# Altium PCB LM-004-B.PcbDoc (part 1 of 2)
Units mil, origin at the board's own origin, x right, y up, seen from the top; angles counter-clockwise.
Board outline 2155.24 x 3589 mil, 4 copper layers (Top Layer, Signal Layer 2, Signal Layer 1, Bottom Layer), stack 30.635 mil thick; 59 components, 75 nets, 330 pads, 41 vias.
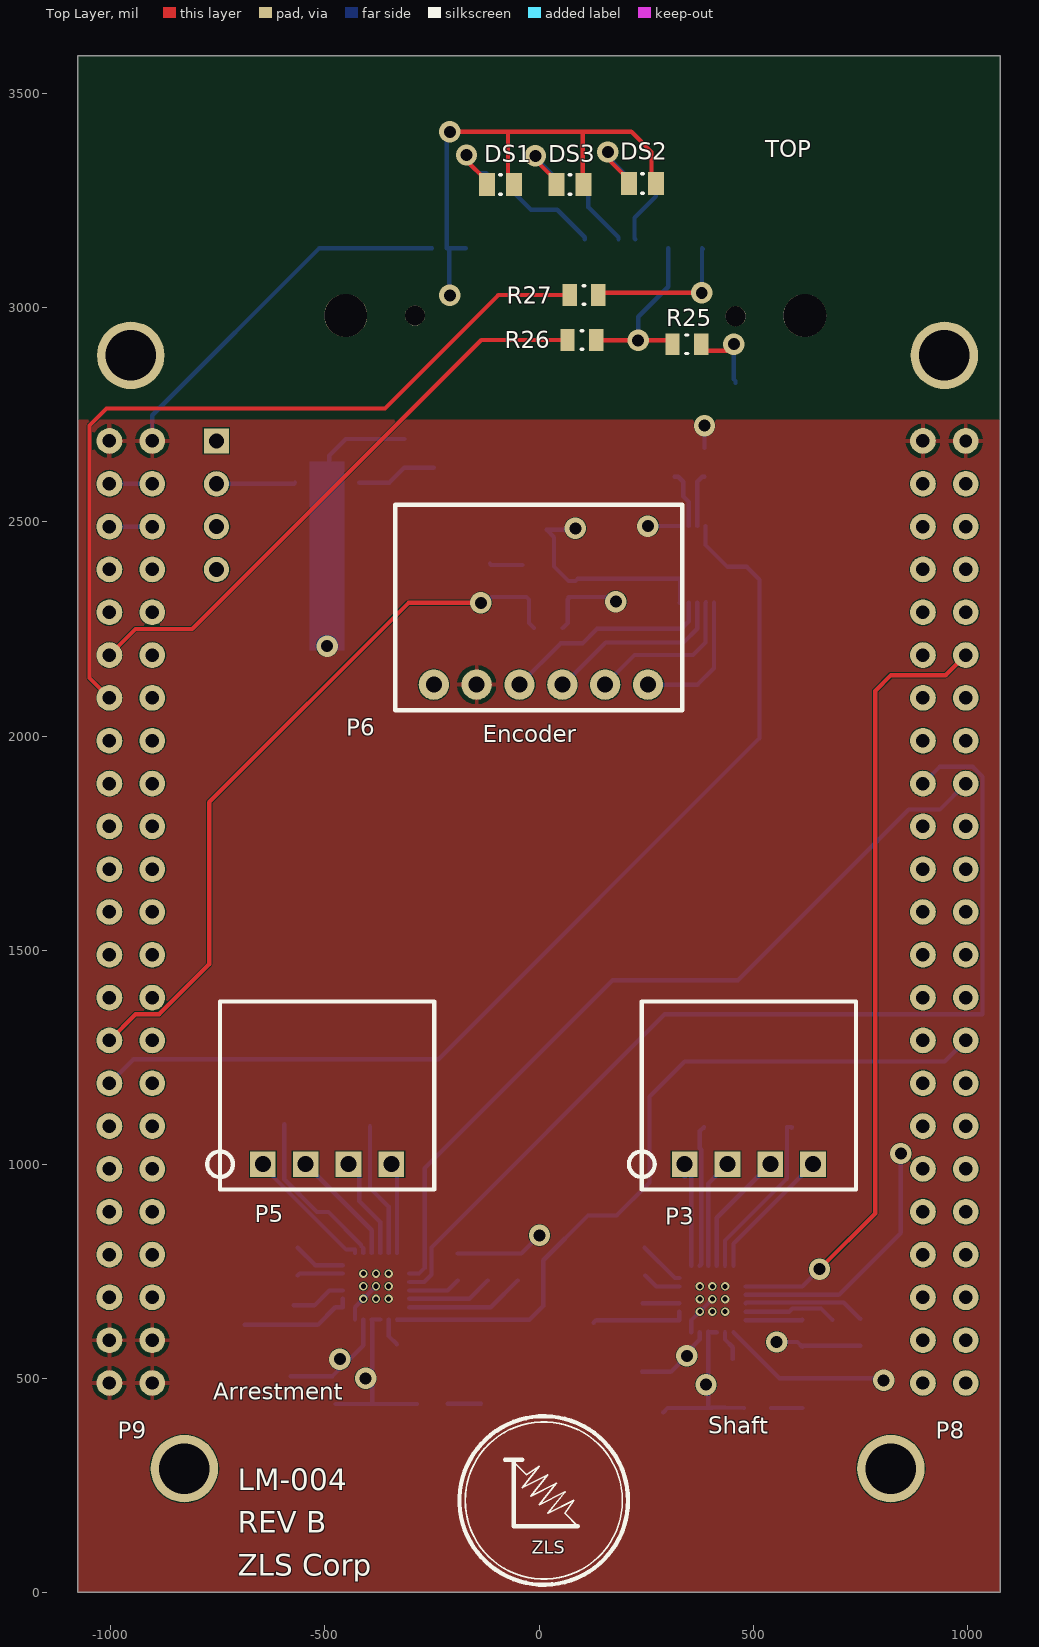
[diagram p0: Top Layer view]
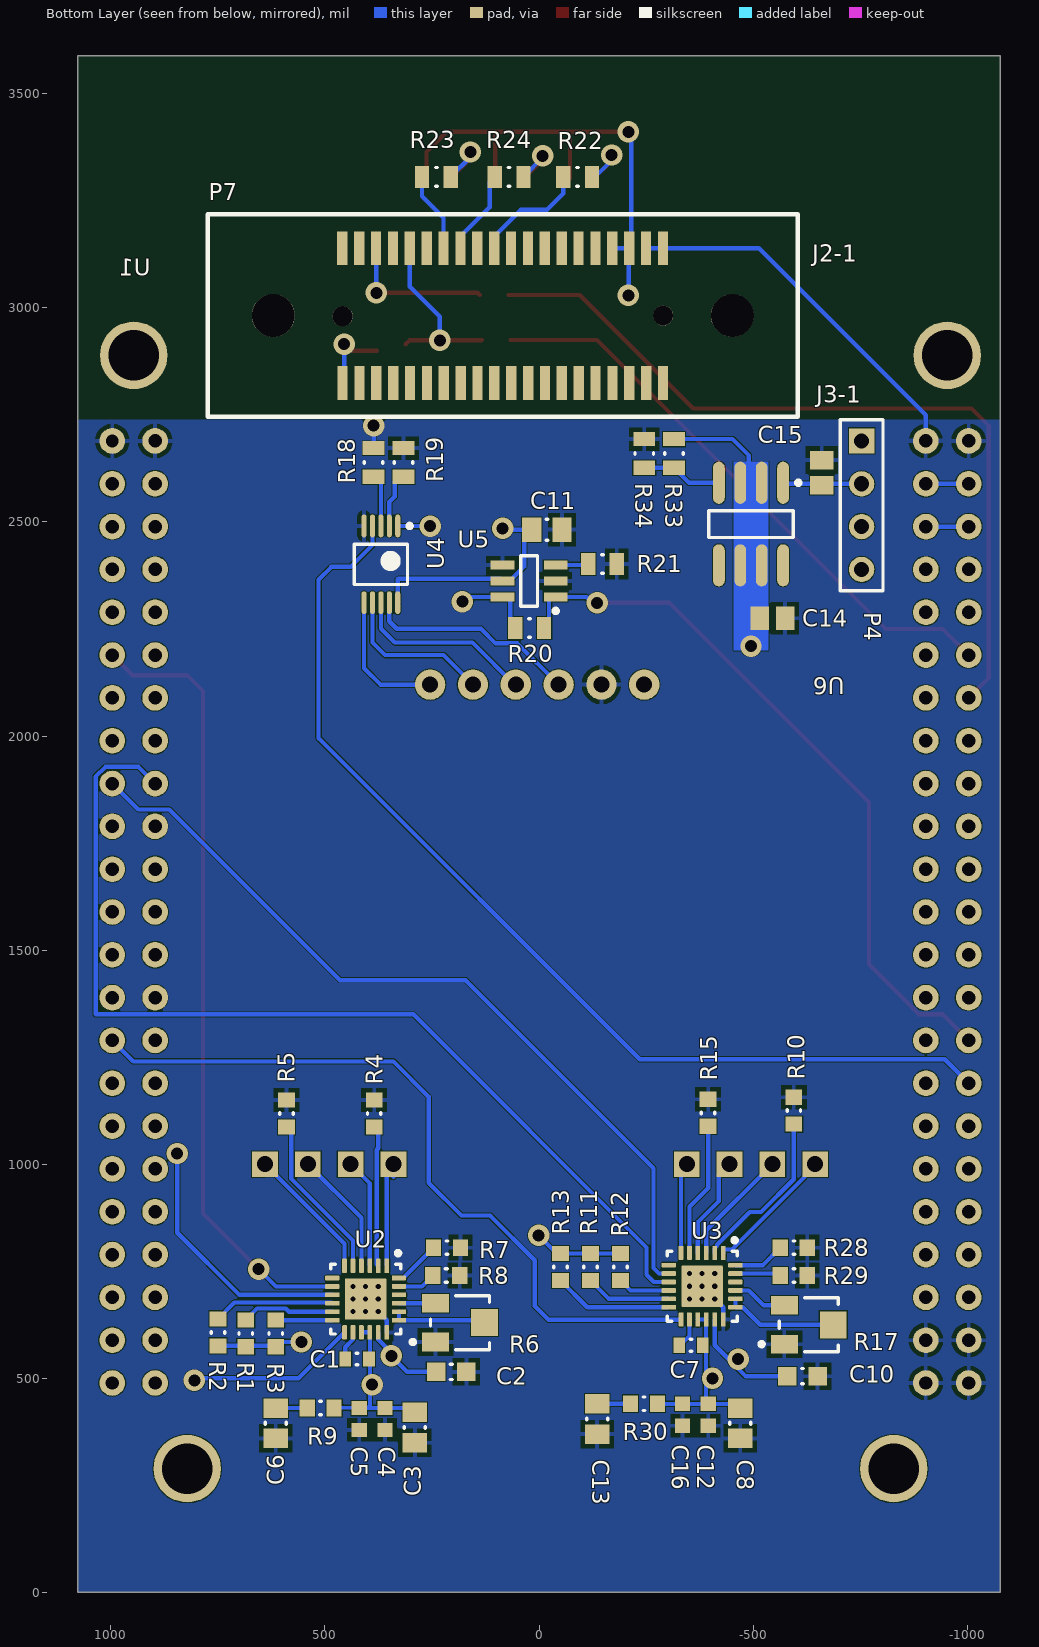
[diagram p1: Bottom Layer view, seen from below]
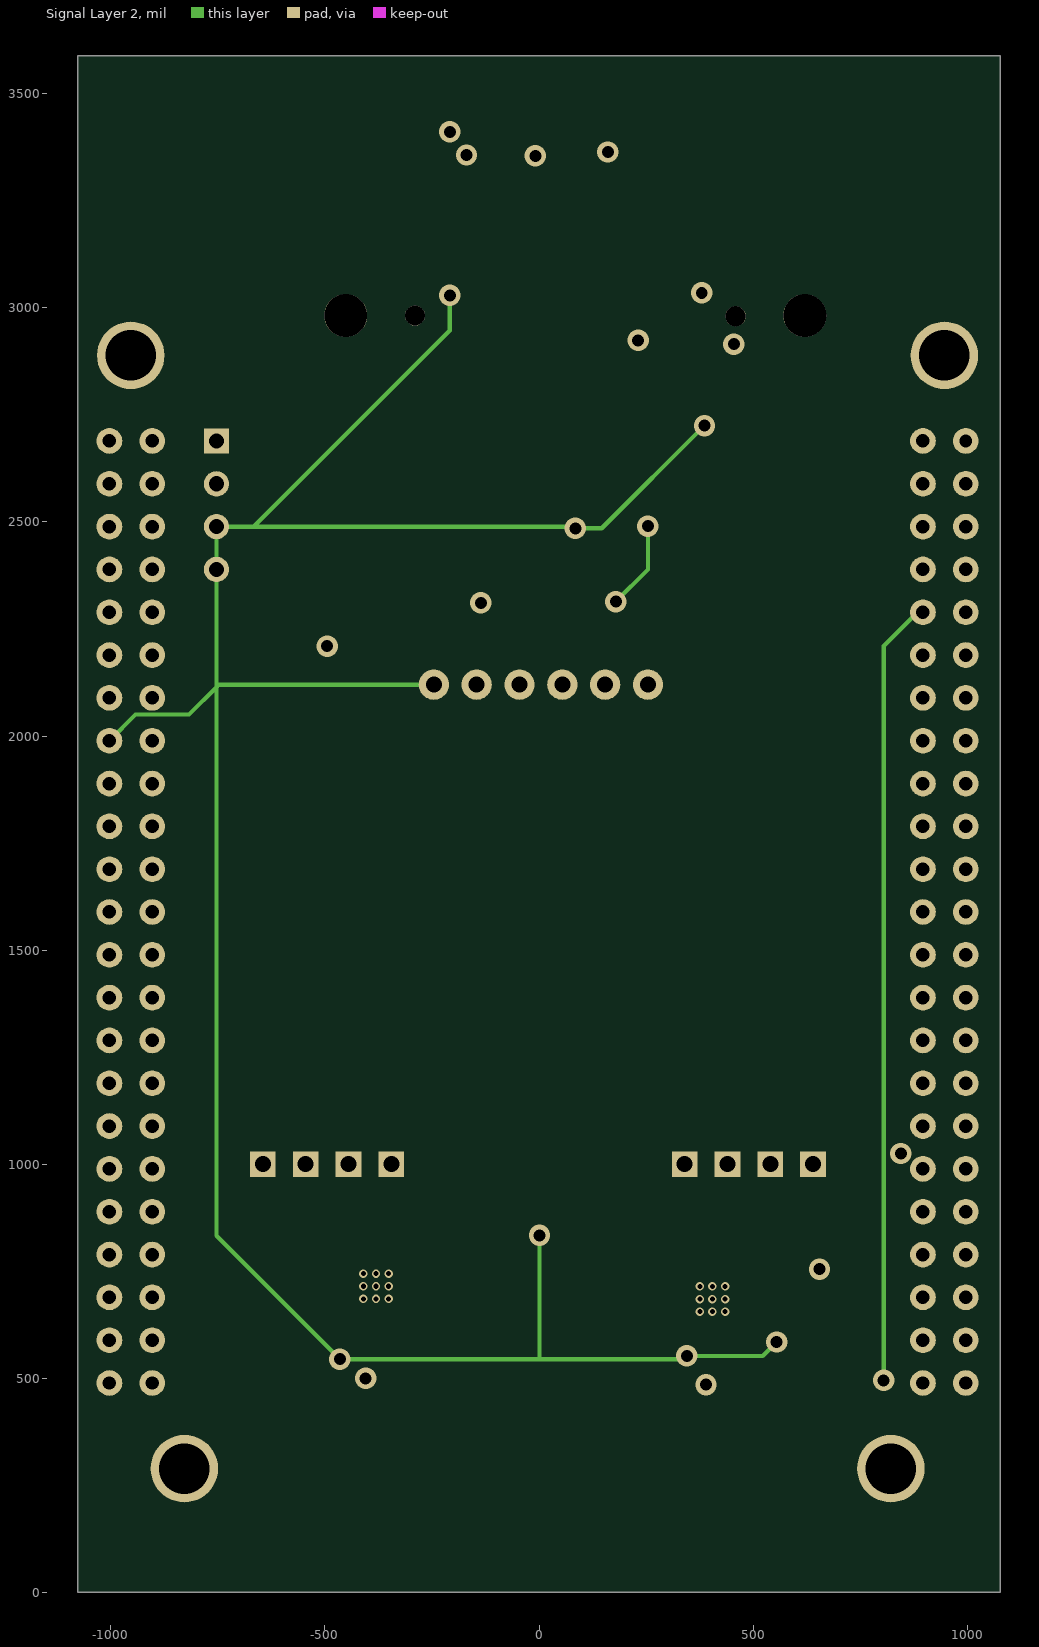
[diagram p2: Signal Layer 2]
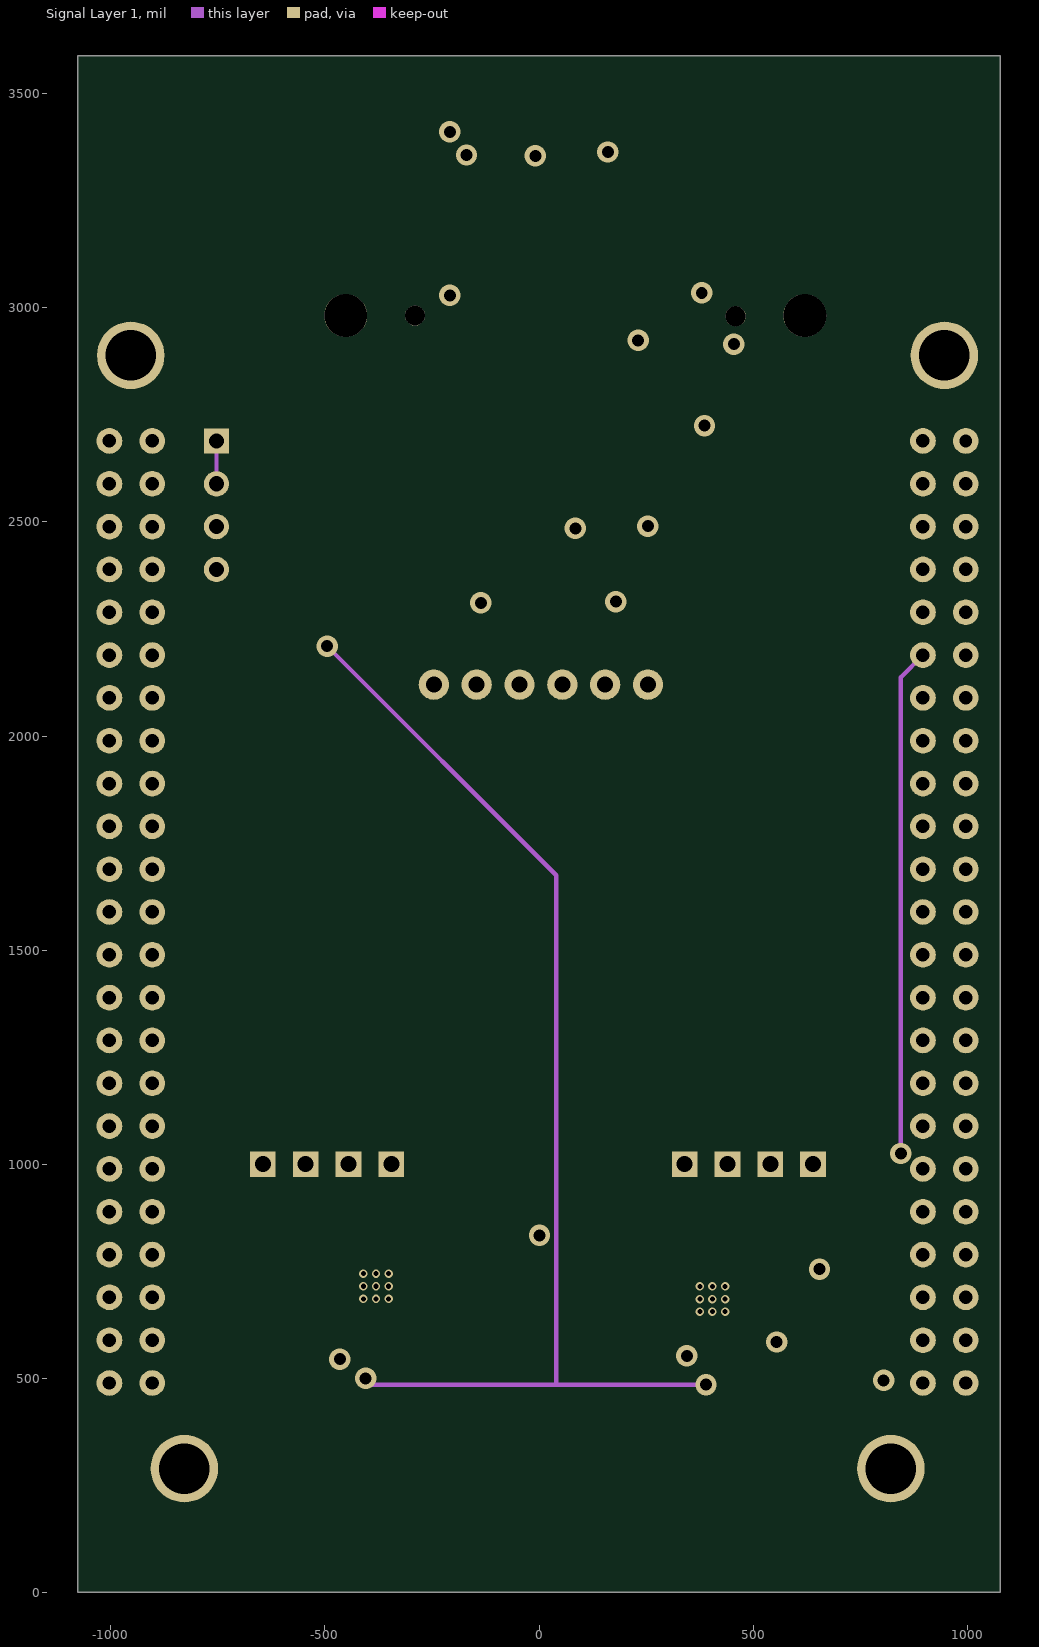
[diagram p3: Signal Layer 1]

## Layer stack, top to bottom
Top Solder: solder mask 0.4, Solder Resist, Dk 3.5
Top Layer: signal copper 1.4
Dielectric 1: core 10, FR-4, Dk 4.2
Signal Layer 2: signal copper 1.4173
Dielectric 4: prepreg 5, Dk 4.2
Signal Layer 1: signal copper 1.4173
Dielectric 3: core 10, Dk 4.2
Bottom Layer: signal copper 1.4
Bottom Solder: solder mask 0.4, Solder Resist, Dk 3.5

## Board outline
-1077.62,0 1077.62,0 1077.62,3589 -1077.62,3589

## Design rules (kind name [scope] priority, off if disabled: settings)
Clearance [All] p1: gap=1.97 ignorepadtopadclearanceinfootprint=TRUE except(0: SMDPad-Via; 1: SMDPad-SMDPad SMDPad-THPad THPad-THPad Via-Via Via-Fill Via-Poly Via-Region Via-Text Via-Hole)
HoleSize [All] p1: absolutevalues=TRUE maxlimit=196.85 minlimit=1 maxpercent=80.000 minpercent=20.000
HoleToHoleClearance [All] p1: gap=1 allowstackedmicrovias=TRUE
MinimumSolderMaskSliver [All] p1: minsoldermaskwidth=1
PolygonConnect [All] p1: connectstyle=Relief reliefconductorwidth=10 reliefentries=4 polygonreliefangle="90 Angle" airgapwidth=10
RoutingVias [All] p1: holewidth=28 width=50 viastyle="Through Hole" minholewidth=10 minwidth=15 maxholewidth=28 maxwidth=50
SilkToSolderMaskClearance [IsPad] p1: minsilkscreentomaskgap=1.97 clearancetoexposedcopper=TRUE
SolderMaskExpansion [All] p1: expansion=1.97
Width [All] p1: maxlimit=10 minlimit=10 preferedwidth=10
26 further rules are at their usual default settings.

## Classes and differential pairs
component class Bluetooth: DS1 DS2 DS3 P7 R22 R23 R24 R25 R26 R27
component class BBB_Connections: C14 C15 P3 P4 P5 R33 R34 U1 U6
component class DC-Motor-DRV: C1 C2 C3 C4 C5 C6 C7 C8 C10 C12 C13 C16 R1 R2 R3 R4 R5 R6 R7 R8 R9 R10 R11 R12 R13 R15 R17 R28 R29 R30 U2 U3
component class Encoder: C11 P6 R18 R19 R20 R21 U4 U5

## Components (designator, comment, footprint, x,y, rotation, side; value= is the part's Value field where it differs from the comment)
C1 "10nF" CAPC0603(1608)100_L 425,545 r0 bottom
C2 "4.7uF" CAPC0603(1608)55_M 205,515 r0 bottom
C3 "10uF" CAPC0805(2012)145_N 290,385 r90 bottom
C4 "0.1uF" CAPC1608X94X35LL15T15 420,405 r270 bottom
C5 "0.1uF" CAPC1608X94X35LL15T15 360,405 r270 bottom
C6 "10uF" CAPC0805(2012)145_N 615,395 r90 bottom
C7 "10nF" CAPC0603(1608)100_L -355,577.1 r0 bottom
C8 "10uF" CAPC0805(2012)145_N -470,395 r90 bottom
C10 "4.7uF" CAPC0603(1608)55_M -615,505 r0 bottom
C11 "CAP CER 0.1UF 25V X7R 0805" CAPC0805(2012)145_N -18.2,2481.99 r180 bottom
C12 "0.1uF" CAPC1608X94X35LL15T15 -395,415 r270 bottom
C13 "10uF" CAPC0805(2012)145_N -135.69,405 r90 bottom
C14 "Cap Pol3" C0805 -545,2275 r180 bottom value=10uF
C15 "Cap Pol3" C0805 -660,2615 r90 bottom value=10uF
C16 "0.1uF" CAPC1608X94X35LL15T15 -335,415 r270 bottom
DS1 "Lite-On LTST-S220KGKT Green LED, 571 nm 2012 (0805) Side View, Rectangle Lens SMD package" 0805C_L -90.13,3287.99 r180 top
DS2 "Lite-On LTST-S220KGKT Green LED, 571 nm 2012 (0805) Side View, Rectangle Lens SMD package" 0805C_L 242.1,3290.23 r180 top
DS3 "Lite-On LTST-S220KGKT Green LED, 571 nm 2012 (0805) Side View, Rectangle Lens SMD package" 0805C_L 72.1,3287.99 r180 top
P3 "IPL1-104-01-F-S-RA" IPL1-104-01-L-S-RA-K 340,1000 r0 top
P4 "SSW-104-01-G-S" HDR1X4 -753.38,2689 r270 bottom
P5 "IPL1-104-01-F-S-RA" IPL1-104-01-L-S-RA-K -645,1000 r0 top
P6 "IPL1-106-01-L-S-RA-K" IPL1-106-01-L-S-RA-K 4.31,2120 r0 top locked
P7 "FSI-120-03-G-D-E-AB" FSI-120-03-G-D-E-AB 84.62,2982 r180 bottom
R1 "47K" RESC0603(1608)_N 685,605 r270 bottom
R2 "47K" RESC0603(1608)_N 750,607.24 r270 bottom
R3 "47K" RESC0603(1608)_N 614.84,605 r270 bottom
R4 "0.1" RESC0603(1608)_N 385,1118.46 r90 bottom value="1020.00 Ohm"
R5 "0.1" RESC0603(1608)_N 590,1118.46 r90 bottom value="1020.00 Ohm"
R6 "3313J-1-503E" BOUR-3313J-1_V 184.63,630 r180 bottom
R7 "47K" RESC0603(1608)_N 215,805 r0 bottom
R8 "47K" RESC0603(1608)_N 216.71,740 r0 bottom
R9 "1" RESC0603(1608)_N 510,430.59 r180 bottom
R10 "0.1" RESC0603(1608)_N -595,1125 r90 bottom value="1020.00 Ohm"
R11 "47K" RESC0603(1608)_N -120,760 r90 bottom
R12 "47K" RESC0603(1608)_N -190,760 r90 bottom
R13 "47K" RESC0603(1608)_N -50,760 r90 bottom
R15 "0.1" RESC0603(1608)_N -395,1120 r90 bottom value="1020.00 Ohm"
R17 "3313J-1-503E" BOUR-3313J-1_V -630,625 r180 bottom
R18 "10K" RESC0805(2012)_L 386.32,2639 r90 bottom
R19 "10K" RESC0805(2012)_L 316.31,2639 r270 bottom
R20 "DNP" RESC0805(2012)_L 21.8,2251.99 r0 bottom
R21 "43.2K" RESC0805(2012)_L -148.2,2401.99 r180 bottom
R22 "3.9k" RESC0805(2012)_L -90.13,3306 r180 bottom
R23 "3.9k" RESC0805(2012)_L 239.87,3306 r180 bottom
R24 "3.9k" RESC0805(2012)_L 69.87,3306 r180 bottom
R25 "10K" RESC0805(2012)_L 345,2915 r180 top value=3.9k
R26 "100" RESC0805(2012)_L 100,2925 r0 top value=3.9k
R27 "100" RESC0805(2012)_L 105,3030 r0 top value=3.9k
R28 "47K" RESC0603(1608)_N -595,805 r0 bottom
R29 "47K" RESC0603(1608)_N -595,740 r0 bottom
R30 "1" RESC0603(1608)_N -245,440.59 r180 bottom
R33 "0.1" RESC0805(2012)_L -315,2660 r90 bottom
R34 "0.1" RESC0805(2012)_L -245.68,2660 r270 bottom
U1 "BBB" "BEAGLEBONE BLACK MEZANINE" -3.38,1589 r180 bottom locked
U2 "DRV8834RGER" RGE0024B_V 405,685 r270 bottom
U3 "DRV8834RGER" RGE0024B_V -380.81,715 r270 bottom
U4 "MAX1484EUB+" MAX1484EUB+ 369.32,2401 r270 bottom
U5 "LTC6994MPS6-2#TRMPBF" LTC6994MPS6-2#TRMPBF 23.29,2361.99 r0 bottom
U6 "LM317LM/NOPB" M08A_M -495,2495 r270 bottom

## Footprints (in the part's own frame and the unit in brackets; to place one, negate y for a bottom-side part, rotate by r counter-clockwise, add the part's x,y. Pads: shape width x height; smd on the part's side, far side on the other; paste and mask are expansions set on the pad)
0805C_L [mm]
  rect 0.95x1.35 smd: 1(-0.8,0) 2(0.8,0)
  silkscreen extent -0.05,-0.58 0.05,0.58, body extent -1.1,-0.72 1.1,0.72, height 0.75
"BEAGLEBONE BLACK MEZANINE" [mil]
  round 60 hole 31.5: 8-1(-900,1100) 8-3(-900,1000) 8-4(-1000,1000) 8-5(-900,900) 8-6(-1000,900) 8-7(-900,800) 8-8(-1000,800) 8-9(-900,700) 8-10(-1000,700) 8-11(-900,600) 8-12(-1000,600) 8-13(-900,500) 8-14(-1000,500) 8-15(-900,400) 8-16(-1000,400) 8-17(-900,300) 8-18(-1000,300) 8-19(-900,200) 8-20(-1000,200) 8-21(-900,100) 8-22(-1000,100) 8-23(-900,0) 8-24(-1000,0) 8-25(-900,-100) 8-26(-1000,-100) 8-27(-900,-200) 8-28(-1000,-200) 8-29(-900,-300) 8-30(-1000,-300) 8-31(-900,-400) 8-32(-1000,-400) 8-33(-900,-500) 8-34(-1000,-500) 8-35(-900,-600) 8-36(-1000,-600) 8-37(-900,-700) 8-38(-1000,-700) 8-39(-900,-800) 8-40(-1000,-800) 8-41(-900,-900) 8-42(-1000,-900) 8-43(-900,-1000) 8-44(-1000,-1000) 8-45(-900,-1100) 8-46(-1000,-1100) 9-1(1000,1100) 9-2(900,1100) 9-3(1000,1000) 9-4(900,1000) 9-5(1000,900) 9-6(900,900) 9-7(1000,800) 9-8(900,800) 9-9(1000,700) 9-10(900,700) 9-11(1000,600) 9-12(900,600) 9-13(1000,500) 9-14(900,500) 9-15(1000,400) 9-16(900,400) 9-17(1000,300) 9-18(900,300) 9-19(1000,200) 9-20(900,200) 9-21(1000,100) 9-22(900,100) 9-23(1000,0) 9-24(900,0) 9-25(1000,-100) 9-26(900,-100) 9-27(1000,-200) 9-28(900,-200) 9-29(1000,-300) 9-30(900,-300) 9-31(1000,-400) 9-32(900,-400) 9-33(1000,-500) 9-34(900,-500) 9-35(1000,-600) 9-36(900,-600) 9-37(1000,-700) 9-38(900,-700) 9-39(1000,-800) 9-40(900,-800) 9-41(1000,-900) 9-42(900,-900) 9-43(1000,-1000) 9-44(900,-1000) 9-45(1000,-1100) 9-46(900,-1100)
  round 60 hole 30 paste+0: 8-2(-1000,1100)
  round 157.48 hole 118.11 paste+0: ""(-950,1300)
  round 157.48 hole 118.11: ""(-825,-1300) ""(825,-1300) ""(950,1300)
  body extent -1047,-1163 1048,1157, height 335
BOUR-3313J-1_V [mm] "SMD, 3-Leads, Body 3.5x3.2mm, Pitch 1.15mm"
  rect 1.6x1.1 smd paste+0: 1(-1.45,-1.15) 3(-1.45,1.15)
  rect 1.6x1.6 smd paste+0: 2(1.45,0)
  silkscreen extent -2.93,-1.6 1.75,1.6, body extent -1.75,-1.65 1.75,1.65, height 2.11
C0805 [mm] "Chip Capacitor, Body 2.0x1.3mm, IPC High Density"
  rect 1.1x1.4 smd: 1(-0.75,0) 2(0.75,0)
  body extent -1.1,-0.72 1.1,0.72, height 1.4
CAPC0603(1608)55_M [mm] "Chip Capacitor, Body 1.6x0.8mm, Height 0.55mm, IPC Low Density"
  rect 1.1x1.1 smd: 1(-0.9,0) 2(0.9,0)
  silkscreen extent -0.05,-0.45 0.05,0.45, body extent -0.87,-0.47 0.88,0.48, height 0.55
CAPC0603(1608)100_L [mm] "Chip Capacitor, Body 1.6x0.8mm, Height 1.0mm, IPC High Density"
  rect 0.7x0.9 smd: 1(-0.7,0) 2(0.7,0)
  silkscreen extent -0.05,-0.35 0.05,0.35, body extent -0.87,-0.47 0.88,0.48, height 1
CAPC0805(2012)145_N [mm] "Chip Capacitor, Body 2.0x1.2mm, Height 1.45mm, IPC Medium Density"
  rect 1.15x1.45 smd: 1(-0.9,0) 2(0.9,0)
  silkscreen extent -0.05,-0.62 0.05,0.63, body extent -1.1,-0.72 1.1,0.73, height 1.45
CAPC1608X94X35LL15T15 [mm]
  rect 0.85x0.9 smd: 1(-0.65,0) 2(0.65,0)
  body extent -0.88,-0.48 0.87,0.48, height 0.94
FSI-120-03-G-D-E-AB [mil]
  round 100 hole 100: hole(-536.2,0) hole(536.2,0)
  round 47 hole 47: hole(-374.3,-1.6) hole(374.3,0)
  rect 24x78.74 smd: J2-1(373.91,157.36) J2-2(334.51,157.36) J2-3(295.11,157.36) J2-4(255.71,157.36) J2-5(216.31,157.36) J2-6(176.91,157.36) J2-7(137.51,157.36) J2-8(98.11,157.36) J2-9(58.71,157.36) J2-10(19.31,157.36) J2-11(-20.09,157.36) J2-12(-59.49,157.36) J2-13(-98.89,157.36) J2-14(-138.29,157.36) J2-15(-177.69,157.36) J2-16(-217.09,157.36) J2-17(-256.49,157.36) J2-18(-295.89,157.36) J2-19(-335.29,157.36) J2-20(-374.69,157.36) J3-1(374.3,-157.36) J3-2(334.9,-157.36) J3-3(295.5,-157.36) J3-4(256.1,-157.36) J3-5(216.7,-157.36) J3-6(177.3,-157.36) J3-7(137.9,-157.36) J3-8(98.5,-157.36) J3-9(59.1,-157.36) J3-10(19.7,-157.36) J3-11(-19.7,-157.36) J3-12(-59.1,-157.36) J3-13(-98.5,-157.36) J3-14(-137.9,-157.36) J3-15(-177.3,-157.36) J3-16(-216.7,-157.36) J3-17(-256.1,-157.36) J3-18(-295.5,-157.36) J3-19(-334.9,-157.36) J3-20(-374.3,-157.36)
  silkscreen extent -689,-236 689,236, body extent -633,-179 710,188, height 162
HDR1X4 [mm] "Connector; Header; 4 Position"
  rect 1.5x1.5 hole 0.9: 1(0,0)
  round 1.5 hole 0.9: 2(2.54,0) 3(5.08,0) 4(7.62,0)
  silkscreen extent -1.27,-1.27 8.89,1.27
IPL1-104-01-L-S-RA-K [mil]
  rect 60x60 hole 37.4: 1(0,0) 2(100,0) 3(200,0) 4(300,0)
  silkscreen extent -130,-59 400,380, body extent -80,-12 380,380, height 258
IPL1-106-01-L-S-RA-K [mm]
  round 1.8 hole 0.95: 1(-6.35,0) 2(-3.81,0) 3(-1.27,0) 4(1.27,0) 5(3.81,0) 6(6.35,0)
  silkscreen extent -8.64,-1.52 8.38,10.67, body extent -8.38,-0.25 8.38,10.41, height 6.56
LTC6994MPS6-2#TRMPBF [mm] "SOT23, 6-Leads, Body 2.90x3.23mm, Pitch 0.95mm, IPC Medium Density"
  rect 1.4x0.55 smd: 1(-1.575,0.95) 2(-1.575,0) 3(-1.575,-0.95) 4(1.575,-0.95) 5(1.575,0) 6(1.575,0.95)
  silkscreen extent -1.7,-1.5 0.5,1.9, body extent -1.93,-1.5 1.92,1.5, height 1
M08A_M [mm] "SOIC, 8-Leads, Body 4.9x3.9mm, Pitch 1.27mm, IPC Low Density"
  oval 2.5x0.7 smd: 1(-2.45,1.905) 2(-2.45,0.635) 3(-2.45,-0.635) 4(-2.45,-1.905) 5(2.45,-1.905) 6(2.45,-0.635) 7(2.45,0.635) 8(2.45,1.905)
  silkscreen extent -2.57,-2.5 0.8,2.93, body extent -2,-2.5 2,2.5, height 1.75
MAX1484EUB+ [mm]
  oval 1.35x0.3 smd: 1(-2.275,1) 2(-2.275,0.5) 3(-2.275,0) 4(-2.275,-0.5) 5(-2.275,-1) 6(2.275,-1) 7(2.275,-0.5) 8(2.275,0) 9(2.275,0.5) 10(2.275,1)
  silkscreen extent -2.4,-1.57 1.2,1.82, body extent -2.45,-1.6 2.45,1.6, height 1.09
RESC0603(1608)_N [mm] "Chip Resistor, Body 1.6x0.8mm, IPC Medium Density"
  rect 0.9x1 smd: 1(-0.8,0) 2(0.8,0)
  silkscreen extent -0.05,-0.4 0.05,0.4, body extent -0.85,-0.47 0.85,0.47, height 0.6
RESC0805(2012)_L [mm] "Chip Resistor, Body 2.0x1.3mm, IPC High Density"
  rect 0.85x1.3 smd: 1(-0.85,0) 2(0.85,0)
  silkscreen extent -0.05,-0.55 0.05,0.55, body extent -1.1,-0.67 1.1,0.68, height 0.7
RGE0024B_V [mm] "QFN, 24-Leads, Body 4x4mm, Pitch 0.5mm, Thermal Pad 2.45x2.45mm"
  rrect36% 0.85x0.28 smd paste-0.025 mask+0.07: 1(-1.975,1.25) 2(-1.975,0.75) 3(-1.975,0.25) 4(-1.975,-0.25) 5(-1.975,-0.75) 6(-1.975,-1.25) 13(1.975,-1.25) 14(1.975,-0.75) 15(1.975,-0.25) 16(1.975,0.25) 17(1.975,0.75) 18(1.975,1.25)
  rrect36% 0.28x0.85 smd paste-0.025 mask+0.07: 7(-1.25,-1.975) 8(-0.75,-1.975) 9(-0.25,-1.975) 10(0.25,-1.975) 11(0.75,-1.975) 12(1.25,-1.975) 19(1.25,1.975) 20(0.75,1.975) 21(0.25,1.975) 22(-0.25,1.975) 23(-0.75,1.975) 24(-1.25,1.975)
  rrect4% 2.45x2.45 smd paste-3 mask+0.07: 25(0,0)
  silkscreen extent -2.85,-2.07 2.08,2.08, body extent -2,-2 2,2, height 1

## Part data
C1 C7: library part CMP-1035-02312-1, "CAP 10nF 16V ±20% 0603 (1608 Metric) Thickness 1mm SMD", Case-EIA=0603, Case-Metric=1608, Dielectric=X7R, Manufacturer="Kyocera AVX", Manufacturer Part Number=0603YC103KAT2A, Max Operating Temperature=125°C, Min Operating Temperature=-55°C, Package Quantity=1, Rated Voltage="16 V", Supplier Part Number 1=478-6209-6-ND, Tolerance=±20%, Voltage=16V, Capacitance=10nF, Case/Package=0603, Case Code (Imperial)=0603, Case Code (Metric)=1608, ComponentLink1Description=http://catalogs.avx.com/SurfaceMount.pdf, ComponentLink1URL=http://catalogs.avx.com/SurfaceMount.pdf, ComponentLink2Description=http://www.farnell.com/datasheets/1679506.pdf, ComponentLink2URL=http://www.farnell.com/datasheets/1679506.pdf, ComponentLink3Description=http://www.mouser.com/ds/2/40/X7RDielectric-777024.pdf, ComponentLink3URL=http://www.mouser.com/ds/2/40/X7RDielectric-777024.pdf, ComponentLink4Description=http://www.avx.com/docs/Catalogs/cx7r.pdf, ComponentLink4URL=http://www.avx.com/docs/Catalogs/cx7r.pdf, Depth=0.81mm, Dissipation Factor=3.5%, Lead Free="Lead Free", Length=1.6mm, Max Thickness="1 mm", Mount="Surface Mount", Packaging="Tape and Reel", Pricing 1="1=0.19, 10=0.133, 100=0.0625, 500=0.04384, 1000=0.0363 (USD)", Radiation Hardening=No, REACH SVHC="No SVHC", Stock 1=132527, Supplier 1=Digi-Key, Technology=SMT, Termination=SMD/SMT, Thickness=0.035inch, Voltage Rating=16V, Voltage Rating (DC)=16V, Width=0.032inch
C2 C10: library part CMP-1035-02779-1, "CAP 4.7uF 6.3V ±10% 0603 (1608 Metric) Thickness 0.55mm SMD", Case-EIA=0603, Case-Metric=1608, Dielectric=X5R, Dielectric Material=Ceramic, Manufacturer=KEMET, Manufacturer Part Number=C0603C475K9PACTU, Max Operating Temperature=85°C, Min Operating Temperature=-55°C, Package Quantity=1, Rated Voltage="6.3 V", Supplier Part Number 1=399-3482-6-ND, Tolerance=±10%, Voltage=6.3V, Capacitance=4.7uF, Case/Package=0603, Case Code (Imperial)=0603, Case Code (Metric)=1608, ComponentLink1Description=https://api.kemet.com/component-edge/download/datasheet/C0603C475K9PACTU.pdf, ComponentLink1URL=https://api.kemet.com/component-edge/download/datasheet/C0603C475K9PACTU.pdf, ComponentLink2Description=http://www.farnell.com/datasheets/1732700.pdf, ComponentLink2URL=http://www.farnell.com/datasheets/1732700.pdf, ComponentLink3Description=http://www.farnell.com/datasheets/1789732.pdf, ComponentLink3URL=http://www.farnell.com/datasheets/1789732.pdf, ComponentLink4Description=http://www.farnell.com/datasheets/40889.pdf, ComponentLink4URL=http://www.farnell.com/datasheets/40889.pdf, Contact Plating=Matte,Tin, Depth=0.8mm, Dissipation Factor=5%, Height=0.8mm, Lead Free="Lead Free", Lead Pitch=0.7mm, Length=1.6mm, Max Thickness="0.55 mm", Mount="PCB,Surface Mount", Number of Pins=2, Packaging="Tape and Reel", Pricing 1="1=0.21, 10=0.15, 100=0.0706, 500=0.04952, 1000=0.041 (USD)", Radiation Hardening=No, REACH SVHC="No SVHC", Stock 1=1765509, Supplier 1=Digi-Key, Technology=SMT, Termination=SMD/SMT, Thickness=0.035inch, Voltage Rating=6.3V, Voltage Rating (DC)=6.3V, Width=0.031inch
C3 C6 C8 C13: library part CMP-1036-04795-1, "CAP CER 0.1UF 25V X7R 0805", Capacitance=0.1µF, Manufacturer="Murata Electronics North America", Manufacturer Part Number=GRM21BR71E104KA01L, Operating Temperature="-55°C ~ 125°C", Package / Case="0805 (2012 Metric)", Ratings=-, Supplier Part Number 1=490-1673-6-ND, Temperature Coefficient=X7R, Tolerance=±10%, Voltage - Rated=25V, Applications="General Purpose", Category=Capacitors, ComponentLink1Description=http://www.murata.com/~/media/webrenewal/support/library/catalog/products/capacitor/mlcc/c02e.ashx, ComponentLink1URL=http://www.murata.com/~/media/webrenewal/support/library/catalog/products/capacitor/mlcc/c02e.ashx, Features=-, Height - Seated (Max)=-, Lead Spacing=-, Lead Style=-, Mounting Type="Surface Mount, MLCC", Packaging=Digi-Reel®, Part Status=Active, Pricing 1="1=0.2, 10=0.145, 100=0.0683, 500=0.04788, 1000=0.03964 (USD)", RoHS="RoHS Compliant", Size / Dimension="0.079\" L x 0.049\" W (2.00mm x 1.25mm)", Stock 1=891652, Supplier 1=Digi-Key, Thickness (Max)="0.053\" (1.35mm)"
C4 C5 C12 C16: library part CMP-1661-00001-2, "CAP .1UF 16V CERAMIC X7R 0603", Capacitance=1uF, Case/Package=0603, Case Code (Metric)=1608, Dielectric=X7R, Manufacturer=Yageo, Manufacturer Part Number=CC0603KRX7R7BB105, Max Operating Temperature=125°C, Min Operating Temperature=-55°C, Package Quantity=1, Supplier Part Number 1=311-1446-6-ND, Tolerance=10%, Voltage=16V, Case Code (Imperial)=0603, ComponentLink1Description=Datasheet, ComponentLink1URL=http://datasheets.avx.com/X7RDielectric.pdf, ComponentLink2Description=http://www.yageo.com/documents/recent/UPY-GPHC_X7R_6.3V-to-50V_18.pdf, ComponentLink2URL=http://www.yageo.com/documents/recent/UPY-GPHC_X7R_6.3V-to-50V_18.pdf, ComponentLink3Description=http://www.yageo.com/documents/recent/UPY-GPHC_X7R_6.3V-to-50V_8.pdf, ComponentLink3URL=http://www.yageo.com/documents/recent/UPY-GPHC_X7R_6.3V-to-50V_8.pdf, ComponentLink4Description=http://www.farnell.com/datasheets/1734573.pdf, ComponentLink4URL=http://www.farnell.com/datasheets/1734573.pdf, ComponentLink5Description=http://www.farnell.com/datasheets/1489800.pdf, ComponentLink5URL=http://www.farnell.com/datasheets/1489800.pdf, Composition=Ceramic, Depth=0.8mm, Dissipation Factor=5%, Halogen Free="Halogen Free", Height=0.8mm, Lead Free="Lead Free", Length=1.6mm, Mount="Surface Mount", Number of Pins=2, Packaging="Tape and Reel", Pricing 1="1=0.21, 10=0.143, 100=0.0727, 500=0.04974, 1000=0.044 (USD)", Radiation Hardening=No, REACH SVHC=Unknown, Stock 1=5506121, Supplier 1=Digi-Key, Termination=SMD/SMT, Thickness=0.035inch, Voltage Rating=16V, Voltage Rating (DC)=16V, Width=0.031inch
C11: library part CMP-1036-04795-1, Capacitance=0.1µF, Manufacturer="Murata Electronics North America", Manufacturer Part Number=GRM21BR71E104KA01L, Operating Temperature="-55°C ~ 125°C", Package / Case="0805 (2012 Metric)", Ratings=-, Supplier Part Number 1=490-1673-6-ND, Temperature Coefficient=X7R, Tolerance=±10%, Voltage - Rated=25V, Applications="General Purpose", Category=Capacitors, ComponentLink1Description=http://www.murata.com/~/media/webrenewal/support/library/catalog/products/capacitor/mlcc/c02e.ashx, ComponentLink1URL=http://www.murata.com/~/media/webrenewal/support/library/catalog/products/capacitor/mlcc/c02e.ashx, Features=-, Height - Seated (Max)=-, Lead Spacing=-, Lead Style=-, Mounting Type="Surface Mount, MLCC", Packaging=Digi-Reel®, Part Status=Active, Pricing 1="1=0.2, 10=0.145, 100=0.0683, 500=0.04788, 1000=0.03964 (USD)", RoHS="RoHS Compliant", Size / Dimension="0.079\" L x 0.049\" W (2.00mm x 1.25mm)", Stock 1=891652, Supplier 1=Digi-Key, Thickness (Max)="0.053\" (1.35mm)"
C14 C15: "Polarized Capacitor (Surface Mount)", LatestRevisionDate=29-May-2009, LatestRevisionNote="IPC-7351 Footprint Added.", PackageDescription="Chip Capacitor", PackageReference=C0805, Published=8-Jun-2000, Publisher="Altium Limited"
DS1 DS2 DS3: library part "LED A/K", Case/Package=0805, Case Code (Metric)=2012, Colour=Green, Forward Current=20mA, Forward Voltage=2V, Lens Colour=Colorless, Manufacturer="Vishay / Lite-On", Manufacturer Part Number=LTST-S220KGKT, Max Operating Temperature=85°C, Min Operating Temperature=-55°C, Package Quantity=4000, Power Dissipation=75W, Power Rating=75mW, Supplier Part Number 1=160-1468-1-ND, Case Code (Imperial)=0805, ComponentLink1Description=https://datasheet.ciiva.com/11775/0900766b80dc0b70-11775441.pdf, ComponentLink1URL=https://datasheet.ciiva.com/11775/0900766b80dc0b70-11775441.pdf, ComponentLink2Description=https://datasheet.ciiva.com/2110/s-110-ltst-s220kgkt-2110069.pdf, ComponentLink2URL=https://datasheet.ciiva.com/2110/s-110-ltst-s220kgkt-2110069.pdf, ComponentLink3Description=https://datasheet.ciiva.com/2110/s-110-ltst-s220kgkt-2110070.pdf, ComponentLink3URL=https://datasheet.ciiva.com/2110/s-110-ltst-s220kgkt-2110070.pdf, ComponentLink4Description=https://datasheet.ciiva.com/12400/100-ltst-s220kgkt-59602-12400886.pdf, ComponentLink4URL=https://datasheet.ciiva.com/12400/100-ltst-s220kgkt-59602-12400886.pdf, ComponentLink5Description=https://datasheet.ciiva.com/2110/s-110-ltst-s220kgkt-2110071.pdf, ComponentLink5URL=https://datasheet.ciiva.com/2110/s-110-ltst-s220kgkt-2110071.pdf, ComponentLink6Description=https://datasheet.ciiva.com/16379/ltst-s220kgkt-16379082.pdf, ComponentLink6URL=https://datasheet.ciiva.com/16379/ltst-s220kgkt-16379082.pdf, ComponentLink7Description=http://www.farnell.com/cad/2124774.pdf, ComponentLink7URL=http://www.farnell.com/cad/2124774.pdf, ComponentLink8Description=http://www.farnell.com/datasheets/693084.pdf, ComponentLink8URL=http://www.farnell.com/datasheets/693084.pdf, Depth=0.6mm, Dominant Wavelength=568nm, Height=0.6mm, Illumination Colour=Green, Lead Free="Lead Free", Length=2.1mm, Lens Style=Diffused,Colorless, Lens Transparency=Clear, Luminous Intensity=35mcd, Mount="Surface Mount", Number of Elements=1, Number of LEDs=1, Number of Pins=2, Packaging="Tape and Reel", Pricing 1="1=0.29, 10=0.212, 25=0.1564, 100=0.1117, 250=0.0759, 500=0.067, 1000=0.0525 (USD)", Pricing 2="1=0.325, 10=0.317, 100=0.23, 200=0.228, 400=0.182, 900=0.147, 3000=0.114, 9000=0.107 (GBP)", Radiation Hardening=No, RoHS=YES, Stock 1=74800, Stock 2=2271, Supplier 1=Digi-Key, Supplier 2=Farnell, Supplier Part Number 2=2062310, Test Current=20mA, Viewing Angle=130°, Wavelength=574nm, Width=1mm
P4: library part "Header 4", "Header, 4-Pin", Current Rating="5.7A per Contact", Insulation Color=Black, Manufacturer="Samtec Inc.", Material Flammability Rating="UL94 V-0", Operating Temperature="-55°C ~ 125°C", Supplier Part Number 1=SAM1209-04-ND, Voltage Rating=-, Applications=-, Category="Connectors, Interconnects", ComponentLink1Description=http://suddendocs.samtec.com/prints/ssw-1xx-xx-xxx-x-xx-xxx-xx-mkt.pdf, ComponentLink1URL=http://suddendocs.samtec.com/prints/ssw-1xx-xx-xxx-x-xx-xxx-xx-mkt.pdf, Connector Type=Receptacle, Contact Finish - Mating=Gold, Contact Finish - Post=Gold, Contact Finish Thickness - Mating="20.0µin (0.51µm)", Contact Finish Thickness - Post="3.00µin (0.076µm)", Contact Length - Post="0.104\" (2.64mm)", Contact Material="Phosphor Bronze", Contact Shape=Square, Contact Type=Forked, Fastening Type=Push-Pull, Features=-, Ingress Protection=-, Insulation Height="0.335\" (8.51mm)", Insulation Material="Liquid Crystal Polymer (LCP)", Manufacturer Part Number=SSW-104-01-G-S, Mated Stacking Heights=-, Mounting Type="Through Hole", Number of Positions=4, Number of Positions Loaded=All, Packaging=Bulk, Part Status=Active, Pitch - Mating="0.100\" (2.54mm)", Pricing 1="1=1.85, 10=1.654, 100=1.3623, 500=1.07684, 1000=0.9244, 5000=0.84331, 10000=0.81088 (USD)", RoHS="RoHS Compliant", Row Spacing - Mating=-, Stock 1=360, Style="Board to Board or Cable", Supplier 1=Digi-Key, Termination=Solder
P6: library part "Header 6", "Header, 6-Pin", Current Rating=-, Insulation Color=Natural, Manufacturer="Samtec Inc.", Material Flammability Rating="UL94 V-0", Operating Temperature="-55°C ~ 125°C", Supplier Part Number 1=SAM9602-ND, Voltage Rating="675VAC, 954VDC", Applications=-, Category="Connectors, Interconnects", ComponentLink1Description=http://suddendocs.samtec.com/prints/ipl1-1xx-xx-xxx-s-xx-x-xx-mkt.pdf, ComponentLink1URL=http://suddendocs.samtec.com/prints/ipl1-1xx-xx-xxx-s-xx-x-xx-mkt.pdf, Connector Type=Header, Contact Finish - Mating=Gold, Contact Finish - Post=Tin, Contact Finish Thickness - Mating="10.0µin (0.25µm)", Contact Finish Thickness - Post=-, Contact Length - Mating="0.215\" (5.46mm)", Contact Length - Post="0.085\" (2.16mm)", Contact Material="Phosphor Bronze", Contact Shape=Square, Contact Type="Male Pin", Fastening Type="Locking Ramp", Features=-, Ingress Protection=-, Insulation Height="0.240\" (6.10mm)", Insulation Material="Liquid Crystal Polymer (LCP)", Manufacturer Part Number=IPL1-106-01-L-S-RA-K, Mated Stacking Heights=-, Mounting Type="Through Hole, Right Angle", Number of Positions=6, Number of Positions Loaded=All, Number of Rows=1, Overall Contact Length=-, Packaging=Tube, Part Status=Active, Pitch - Mating="0.100\" (2.54mm)", Pricing 1="1=2.73, 34=2.39794, 102=2.18, 510=1.853, 1020=1.5805, 5032=1.417 (USD)", RoHS="RoHS Compliant", Row Spacing - Mating=-, Shrouding="Shrouded - 4 Wall", Stock 1=6, Style="Board to Cable/Wire", Supplier 1=Digi-Key, Termination=Solder
R1 R2 R3 R7 R8 R11 R12 R13 R28 R29: library part CMP-1012-00511-1, "RES SMD 10K OHM 1% 1/10W 0603", Case/Package=0603, Case Code (Metric)=1608, Manufacturer=Vishay, Manufacturer Part Number=CRCW060310K0FKEA, Max Operating Temperature=155°C, Max Power Dissipation=100mW, Min Operating Temperature=-55°C, Package Quantity=10, Resistance=10kR, Supplier Part Number 1=311-0.0GRDKR-ND, Temperature Coefficient=100ppm/°C, Tolerance=1%, Voltage Rating=75V, Case Code (Imperial)=0603, ComponentLink1Description=http://www.vishay.com/docs/20008/dcrcw.pdf, ComponentLink1URL=http://www.vishay.com/docs/20008/dcrcw.pdf, ComponentLink2Description=https://www.verical.com/server-webapp/html/getDatasheet?partID=86831, ComponentLink2URL=https://www.verical.com/server-webapp/html/getDatasheet?partID=86831, ComponentLink3Description=http://www.farnell.com/datasheets/2310790.pdf, ComponentLink3URL=http://www.farnell.com/datasheets/2310790.pdf, ComponentLink4Description=http://www.vishay.com/docs/20035/dcrcwe3.pdf, ComponentLink4URL=http://www.vishay.com/docs/20035/dcrcwe3.pdf, ComponentLink5Description=http://www.farnell.com/datasheets/2111203.pdf, ComponentLink5URL=http://www.farnell.com/datasheets/2111203.pdf, ComponentLink6Description=http://uk.rs-online.com/webdocs/0d98/0900766b80d98afc.pdf, ComponentLink6URL=http://uk.rs-online.com/webdocs/0d98/0900766b80d98afc.pdf, Composition="Thick Film", Contact Plating=Lead,Tin, Depth=0.85mm, Features="Automotive AEC-Q200", Height=0.45mm, Lead Free="Lead Free", Length=1.55mm, Military Standard=Not, Number of Pins=2, Number of Terminations=2, Packaging="Tape and Reel", Power Rating=100mW, Pricing 1="1=0.1, 10=0.021, 25=0.0152, 50=0.0114, 100=0.0084, 250=0.00644, 500=0.00514, 1000=0.00379 (USD)", Radiation Hardening=No, REACH SVHC=Unknown, Stock 1=49641653, Supplier 1=Digi-Key, Termination=SMD/SMT, Voltage Rating (DC)=75V, Weight=7.1E-05oz, Width=0.033inch
R4 R5 R10 R15: library part CMP-1012-00511-1, "0R12 0.1W 1% 0603 (1608 Metric)  SMD", Case-EIA=0603, Case-Metric=1608, Manufacturer=Vishay, Manufacturer Part Number=CRCW060310K0FKEA, Max Operating Temperature=155°C, Max Power Dissipation=100mW, Min Operating Temperature=-55°C, Package Quantity=10, Power="0.1 W", Resistance=10kR, Supplier Part Number 1=311-0.0GRDKR-ND, Temperature Coefficient=100ppm/°C, Tolerance="1 %", Voltage Rating=75V, Case/Package=0603, Case Code (Imperial)=0603, Case Code (Metric)=1608, ComponentLink1Description=http://www.vishay.com/docs/20008/dcrcw.pdf, ComponentLink1URL=http://www.vishay.com/docs/20008/dcrcw.pdf, ComponentLink2Description=https://www.verical.com/server-webapp/html/getDatasheet?partID=86831, ComponentLink2URL=https://www.verical.com/server-webapp/html/getDatasheet?partID=86831, ComponentLink3Description=http://www.farnell.com/datasheets/2310790.pdf, ComponentLink3URL=http://www.farnell.com/datasheets/2310790.pdf, ComponentLink4Description=http://www.vishay.com/docs/20035/dcrcwe3.pdf, ComponentLink4URL=http://www.vishay.com/docs/20035/dcrcwe3.pdf, ComponentLink5Description=http://www.farnell.com/datasheets/2111203.pdf, ComponentLink5URL=http://www.farnell.com/datasheets/2111203.pdf, ComponentLink6Description=http://uk.rs-online.com/webdocs/0d98/0900766b80d98afc.pdf, ComponentLink6URL=http://uk.rs-online.com/webdocs/0d98/0900766b80d98afc.pdf, Composition="Thick Film", Contact Plating=Lead,Tin, Depth=0.85mm, Features="Automotive AEC-Q200", Height=0.45mm, Lead Free="Lead Free", Length=1.55mm, Military Standard=Not, Number of Pins=2, Number of Terminations=2, Packaging="Tape and Reel", Power Rating=100mW, Pricing 1="1=0.1, 10=0.021, 25=0.0152, 50=0.0114, 100=0.0084, 250=0.00644, 500=0.00514, 1000=0.00379 (USD)", Radiation Hardening=No, REACH SVHC=Unknown, Stock 1=49641653, Supplier 1=Digi-Key, Technology=SMT, Termination=SMD/SMT, Voltage Rating (DC)=75V, Weight=7.1E-05oz, Width=0.033inch
R6 R17: library part CMP-2000-05588-1, "3 mm Trimpot(R) Trimming Potentiometer, 50 KOhm, +/- 20%, 0.125 W, -55 to 125 degC, 3-Pin SMD, RoHS, Tape and Reel", Manufacturer=Bourns, Package Description="3-Pin Surface Mount Device, Body 3.5 x 3.2 mm, Pitch 1.15 mm", Package Reference=3313J-1, Power Rating=125mW, Resistance Tolerance=±20%, Temperature Coefficient=±150ppm/°C, Track Resistance=50kohm, Datasheet URL=http://www.bourns.com/docs/Product-Datasheets/3313.pdf, Datasheet Version=05/2016, Manufacturer URL=http://www.bourns.com/, Mounting Technology=SurfaceMount, No. of Turns=1, Potentiometer Mounting=SMD, SVHC=NoSVHC(19-Dec-2012)
R9 R30: library part CMP-1012-00511-1, "RES SMD 1 OHM 1% 1/10W 0603", Case/Package=0603, Case Code (Metric)=1608, Manufacturer="Vishay Dale", Manufacturer Part Number=CRCW06031R00FKEA, Max Operating Temperature=155°C, Max Power Dissipation=100mW, Min Operating Temperature=-55°C, Package Quantity=10, Resistance=1R, Supplier Part Number 1=541-1.00HHDKR-ND, Temperature Coefficient=100ppm/°C, Tolerance=1%, Voltage Rating=75V, Case Code (Imperial)=0603, ComponentLink1Description=http://www.vishay.com/docs/20008/dcrcw.pdf, ComponentLink1URL=http://www.vishay.com/docs/20008/dcrcw.pdf, ComponentLink2Description=https://www.verical.com/server-webapp/html/getDatasheet?partID=86831, ComponentLink2URL=https://www.verical.com/server-webapp/html/getDatasheet?partID=86831, ComponentLink3Description=http://www.farnell.com/datasheets/2310790.pdf, ComponentLink3URL=http://www.farnell.com/datasheets/2310790.pdf, ComponentLink4Description=http://www.vishay.com/docs/20035/dcrcwe3.pdf, ComponentLink4URL=http://www.vishay.com/docs/20035/dcrcwe3.pdf, ComponentLink5Description=http://www.farnell.com/datasheets/2111203.pdf, ComponentLink5URL=http://www.farnell.com/datasheets/2111203.pdf, ComponentLink6Description=http://uk.rs-online.com/webdocs/0d98/0900766b80d98afc.pdf, ComponentLink6URL=http://uk.rs-online.com/webdocs/0d98/0900766b80d98afc.pdf, ComponentLink7Description=http://www.farnell.com/datasheets/2045673.pdf, ComponentLink7URL=http://www.farnell.com/datasheets/2045673.pdf, ComponentLink8Description=https://www.alliedelec.com/m/d/0c934d6939ccefa68dbe0b96d821c8cf.pdf, ComponentLink8URL=https://www.alliedelec.com/m/d/0c934d6939ccefa68dbe0b96d821c8cf.pdf, ComponentLink9Description=http://www.mouser.com/ds/2/427/dcrcwe3-109170.pdf, ComponentLink9URL=http://www.mouser.com/ds/2/427/dcrcwe3-109170.pdf, Composition="Thick Film", Contact Plating=Tin, Depth=0.85mm, Features="Automotive AEC-Q200", Height=0.02inch, Lead Free="Lead Free", Length=1.55mm, Military Standard=Not, Mount="Surface Mount", Number of Pins=2, Number of Terminations=2, Packaging="Tape and Reel", Power Rating=100mW, Pricing 1="1=0.1, 10=0.046, 100=0.0187, 1000=0.0084, 2500=0.00729 (USD)", Radiation Hardening=No, REACH SVHC=Unknown, Stock 1=1170, Supplier 1=Digi-Key, Termination=SMD/SMT, Voltage Rating (DC)=75V, Weight=7.1E-05oz, Width=0.033inch
R18 R19: library part CMP-1013-00215-1, "RES SMD 10K OHM 1% 1/8W 0805", Manufacturer="Vishay Dale", Manufacturer Part Number=CRCW080510K0FKEA, Operating Temperature="-55°C ~ 155°C", Package / Case="0805 (2012 Metric)", Power (Watts)="0.125W, 1/8W", Supplier Device Package=0805, Supplier Part Number 1=541-10.0KCCT-ND, Temperature Coefficient=±100ppm/°C, Tolerance=±1%, Category=Resistors, ComponentLink1Description=http://www.vishay.com/docs/20035/dcrcwe3.pdf, ComponentLink1URL=http://www.vishay.com/docs/20035/dcrcwe3.pdf, Composition="Thick Film", Failure Rate=-, Features="Automotive AEC-Q200", Height - Seated (Max)="0.020\" (0.50mm)", Packaging="Cut Tape (CT)", Part Status=Active, Pricing 1="1=0.1, 10=0.055, 100=0.0223, 1000=0.01003, 2500=0.0087 (USD)", RoHS="RoHS Compliant", Size / Dimension="0.079\" L x 0.049\" W (2.00mm x 1.25mm)", Stock 1=1104982, Supplier 1=Digi-Key
R20: library part CMP-1013-00215-1, "RES SMD 0 OHM 5% 1/8W 0805"
R21: library part CMP-1013-00215-1, "RES SMD 43.2K OHM 1% 1/8W 0805", Manufacturer="Vishay Dale", Manufacturer Part Number=CRCW080543K2FKEA, Operating Temperature="-55°C ~ 155°C", Package / Case="0805 (2012 Metric)", Power (Watts)="0.125W, 1/8W", Supplier Device Package=0805, Supplier Part Number 1=541-43.2KCCT-ND, Temperature Coefficient=±100ppm/°C, Tolerance=±1%, Category=Resistors, ComponentLink1Description=http://www.vishay.com/docs/20035/dcrcwe3.pdf, ComponentLink1URL=http://www.vishay.com/docs/20035/dcrcwe3.pdf, Composition="Thick Film", Failure Rate=-, Features="Automotive AEC-Q200", Height - Seated (Max)="0.020\" (0.50mm)", Packaging="Cut Tape (CT)", Part Status=Active, Pricing 1="1=0.1, 10=0.055, 100=0.0223, 1000=0.01003, 2500=0.0087 (USD)", RoHS="RoHS Compliant", Size / Dimension="0.079\" L x 0.049\" W (2.00mm x 1.25mm)", Stock 1=68577, Supplier 1=Digi-Key
R22 R23 R24 R25 R26 R27: library part CMP-1013-00215-1, "2R55 0.125W 1% 0805 (2012 Metric)  SMD", Case-EIA=0805, Case-Metric=2012, Power="0.125 W", Tolerance="1 %", Technology=SMT
R33 R34: library part CMP-1013-00215-1, "RES SMD 1R OHM 1% 1/8W 0805", Manufacturer="Vishay Dale", Manufacturer Part Number=CRCW080510K0FKEA, Operating Temperature="-55°C ~ 155°C", Package / Case="0805 (2012 Metric)", Power (Watts)="0.125W, 1/8W", Supplier Device Package=0805, Supplier Part Number 1=541-10.0KCCT-ND, Temperature Coefficient=±100ppm/°C, Tolerance=±1%, Category=Resistors, ComponentLink1Description=http://www.vishay.com/docs/20035/dcrcwe3.pdf, ComponentLink1URL=http://www.vishay.com/docs/20035/dcrcwe3.pdf, Composition="Thick Film", Failure Rate=-, Features="Automotive AEC-Q200", Height - Seated (Max)="0.020\" (0.50mm)", Packaging="Cut Tape (CT)", Part Status=Active, Pricing 1="1=0.1, 10=0.055, 100=0.0223, 1000=0.01003, 2500=0.0087 (USD)", RoHS="RoHS Compliant", Size / Dimension="0.079\" L x 0.049\" W (2.00mm x 1.25mm)", Stock 1=1104982, Supplier 1=Digi-Key
U1: library part Beaglebone_Black_Mezanine, "Beaglebone Black", Current Rating="5.7A per Contact", Insulation Color=Black, Manufacturer="Samtec Inc.", Manufacturer Part Number=SSW-123-01-G-D-LL, Material Flammability Rating="UL94 V-0", Operating Temperature="-55°C ~ 125°C", Supplier Part Number 1=SSW-123-01-G-D-LL-ND, Voltage Rating=-, Applications=-, Category="Connectors, Interconnects", Connector Type=Receptacle, Contact Finish - Mating=Gold, Contact Finish - Post=Gold, Contact Finish Thickness - Mating="20.0µin (0.51µm)", Contact Finish Thickness - Post="3.00µin (0.076µm)", Contact Length - Post="0.104\" (2.64mm)", Contact Material="Phosphor Bronze", Contact Shape=Square, Contact Type=Forked, Fastening Type=Push-Pull, Features=-, Ingress Protection=-, Insulation Height="0.335\" (8.51mm)", Insulation Material="Liquid Crystal Polymer (LCP)", Mated Stacking Heights=-, Mounting Type="Through Hole", Number of Positions=46, Number of Positions Loaded=All, Packaging=Bulk, Part Status=Active, Pitch - Mating="0.100\" (2.54mm)", Pricing 1="1=6.07 (USD)", RoHS="RoHS Compliant", Row Spacing - Mating="0.100\" (2.54mm)", Stock 1=0, Style="Board to Board or Cable", Supplier 1=Digi-Key, Termination="Kinked Pin, Solder"
U2 U3: library part CMP-1685-00004-1, "Dual-Bridge Stepper or DC Motor Driver, 2.5 to 10.8 V, -40 to 85 degC, 24-pin QFN (RGE), Green (RoHS & no Sb/Br), Tape and Reel", Max Operating Temperature="85 degC", Min Operating Temperature="-40 degC", Min Supply Voltage="2.5 V", Nominal Supply Current="4 mA", Output Current="1.5 A", Package Quantity=3000, ComponentLink1Description="Manufacturer URL", ComponentLink1URL=http://www.ti.com/, ComponentLink2Description=Datasheet, ComponentLink2URL=http://www.ti.com/general/docs/lit/getliterature.tsp?genericPartNumber=DRV8834&fileType=pdf, DatasheetVersion="SLVSB19D, 03/2015", Mount="Surface Mount", Mounting Technology="Surface Mount", PackageDescription="24-Pin Quad Flat No-lead Package, Body 4 x 4 mm, Pitch 0.5 mm", PackageReference=RGE0024B, Packaging="Tape and Reel", Pins=24, Radiation Hardening=No, RoHSCompliant=true
U4: "IC TXRX RS485/RS422 10-UMAX", Base Part Number=MAX1484, Manufacturer="Maxim Integrated", Operating Temperature="-40°C ~ 85°C", Package / Case="10-TFSOP, 10-MSOP (0.118\", 3.00mm Width)", Supplier Device Package=10-uMAX, Supplier Part Number 1=MAX1484EUB+-ND, Voltage - Supply="4.75 V ~ 5.25 V", Category="Integrated Circuits (ICs)", ComponentLink1Description=https://datasheets.maximintegrated.com/en/ds/MAX1481-MAX1486.pdf, ComponentLink1URL=https://datasheets.maximintegrated.com/en/ds/MAX1481-MAX1486.pdf, Data Rate=12Mbps, Duplex=Full, Manufacturer Part Number=MAX1484EUB+, Mounting Type="Surface Mount", Number of Drivers/Receivers=1/1, Packaging=Tube, Part Status=Active, Pricing 1="1=2.57, 10=2.442, 25=2.28, 50=2.28 (USD)", Protocol="RS422, RS485", RoHS="RoHS Compliant", Stock 1=1906, Supplier 1=Digi-Key, Type=Transceiver
U5: Base Part Number=LTC6994, Manufacturer="Linear Technology/Analog Devices", Manufacturer Part Number=LTC6994CS6-2#TRMPBF, Operating Temperature="0°C ~ 70°C", Package / Case="SOT-23-6 Thin, TSOT-23-6", Supplier Device Package=TSOT-23-6, Supplier Part Number 1=LTC6994CS6-2#TRMPBFCT-ND, Voltage - Supply="2.25 V ~ 5.5 V", Available Total Delays="1µs ~ 33.6s", Category="Integrated Circuits (ICs)", ComponentLink1Description=http://www.linear.com/docs/29725, ComponentLink1URL=http://www.linear.com/docs/29725, Delay to 1st Tap=-, Function=Programmable, Mounting Type="Surface Mount", Packaging="Cut Tape (CT)", Part Status=Active, Pricing 1="1=3.42, 25=3.0496, 100=1.9217, 250=1.76156 (USD)", RoHS="RoHS Compliant", Stock 1=1401, Supplier 1=Digi-Key
U6: library part CMP-0062-01007-2, "3-Terminal Adjustable Regulator, 8-pin Narrow SOIC, Pb-Free", Manufacturer="National Semiconductor", PackageTopMarking=NSZXTT*LM317*LM, PowerWise=N, Code_IPC=SOIC127P600-8, Code_JEDEC=MS-012-AA, ComponentLink1Description="LM317L Datasheet", ComponentLink1URL=http://www.national.com/ds/LM/LM317L.pdf, ComponentLink2Description="LM317L Web Page", ComponentLink2URL=http://www.national.com/pf/LM/LM317L.html, ComponentLink3Description="M08A Package Page", ComponentLink3URL=http://www.national.com/packaging/folders/m08a.html, CompType="LDO IC", DatasheetVersion=Apr-2008, PackageDescription="SOIC Narrow, 4.9 x 3.9 x 1.45mm, 8 Lead, 1.27mm Pitch", PackageReference=M08A, PackageVersion="revM, May-2009", PinCount=8, RevisionNote="Component URLs added", RoHS=Y
P7: Supplier 1=Avnet, Supplier Part Number 1=FSI-120-03-G-D-E-AB

## Via types
v1: diameter 50, hole 28, Top Layer to Bottom Layer, 23 vias
v2: diameter 19.68, hole 11.81, Top Layer to Bottom Layer, 18 vias

## Nets (pads, with @x,y where several pads share a name; then routed paths per layer and width w, separated by ;. In a path a pad name is that pad's centre, name@x,y a point inside that pad or via, vN(x,y) a via of type N, cw(c..) or ccw(c..) an arc to the next point about the centre after c; other vN are vias at no path point)
+3.3: C2.2 C10.2 C11.1 DS1.1 DS2.1 DS3.1 P4.3 P4.4 P6.1 P7.J2-3 P7.J2-4 R1.2 R2.2 R3.2 R11.2 R12.2 R13.2 R18.2 U1.9-15 U2.17 U3.17 U4.10 U5.5 | length 8851.8
  Top Layer w10: v1(-208.38,3411) -72.34,3411 ; DS1.1 -72.34,3301.69 -72.34,3411 ; DS3.1 102.1,3289.49 102.1,3411 ; DS2.1@262.65,3287.99 262.65,3363.97 215.62,3411 102.1,3411 ; -72.34,3411 102.1,3411
  Signal Layer 2 w10: U1.9-15 -942.31,2050.06 -817.31,2050.06 -753.38,2114 ; P6.1 -747.38,2120 -753.38,2114 ; v1(-208.38,3029) -208.38,2946.99 -666.37,2489 ; v1(1,834) 1,546.57 3,544.57 ; v1(386.31,2725) 146.31,2485 v1(85,2485) 81,2489 -666.37,2489 ; v1(555,584.72) 522.56,552.28 452.28,552.28 v1(345,552.28) 337.28,544.57 v1(-465,544.57) -753.38,832.94 -753.38,2114 ; -753.38,2114 P4.3 -666.37,2489
  Bottom Layer w10: C10.2 -482.44,505 -410.34,577.1 U3.17 ; P7.J2-3@-209.43,3133 -209.43,3030.06 v1(-208.38,3029) ; v1(-208.38,3411) -215.38,3390.74 -215.38,3139.36 P7.J2-3 P7.J2-4 ; R12.2 R11.2 R13.2 -41.5,791.5 v1(1,834) ; v1(85,2485) 81.99,2481.99 C11.1 34.86,2464.35 34.86,2395.69 68.57,2361.99 U5.5 90.3,2366.99 328.88,2366.99 329.94,2365.93 U4.10 U4.10@328.88,2311.43 ; C2.2 307.72,515 v1(345,552.28) 345,560 375.47,590.47 U2.17 ; R18.2 v1(386.31,2725) ; v1(555,584.72) 603.62,584.72 R3.2 617.09,575.75 R2.2
"+3.3 BBB": U1.9-3 U1.9-4 | length 100
  Bottom Layer w10: U1.9-3 U1.9-4
"+5 BBB": U1.9-5 U1.9-6 | length 100
  Bottom Layer w10: U1.9-5 U1.9-6
+12: C15.1 P4.1 P4.2 U6.1 | length 284.4
  Signal Layer 1 w10: P4.2 P4.1
  Bottom Layer w10: P4.2 -572.46,2589 U6.1
"Blue LED": P7.J2-14 R23.1 | length 167.7
  Bottom Layer w10: P7.J2-14@224.85,3159.96 222.91,3161.9 222.91,3210.29 273.33,3260.71 R23.1
Bluetooth_RXD: P7.J2-18 R27.2 | length 351.1
  Top Layer w10: R27.2 143.46,3035 v1(380,3035)
  Bottom Layer w10: v1(380,3035) 380.51,3035.51 P7.J2-18 P7.J2-18@382.57,3137.3
Bluetooth_TXD: P7.J2-16 R25.2 R26.2 | length 426.6
  Top Layer w10: R26.2 134.46,2924 v1(231.62,2924) 302.54,2924 R25.2
  Bottom Layer w10: v1(231.62,2924) 231.62,2979 301.71,3049.09 P7.J2-16
CLK+: P6.4 U4.8 | length 431.3
  Bottom Layer w10: P6.4 55.89,2118.43 155.68,2218.22 337,2218.22 369.31,2250.54 U4.8
CLK-: P6.5 U4.7 | length 382.3
  Bottom Layer w10: P6.5@147.37,2110.83 147.37,2113.05 P6.5 223.31,2189 359.78,2189 389,2218.22 U4.7 ; U4.7@388.65,2311.25 388.92,2311.51 U4.7@389.84,2312.43
DTA+: P6.3 U4.9 | length 500.1
  Bottom Layer w10: P6.3 50.72,2216.4 101.31,2216.4 135.45,2250.54 332.23,2250.54 349.63,2267.94 U4.9
DTA-: P6.6 U4.6 | length 341.7
  Bottom Layer w10: P6.6 255.06,2120 255.06,2107 268.06,2120 370.35,2120 408.68,2158.34 U4.6
GND: C2.1 C3.1 C4.2 C5.2 C6.1 C8.1 C10.1 C11.2 C12.2 C13.1 C14.2 C15.2 C16.2 P6.2 P7.J2-1 P7.J2-2 R4.2 R5.2 R6.1 R7.1 R8.1 R10.2 R15.2 R17.1 R19.1 R21.2 R28.1 R29.1 R34.1 U1.8-1 U1.8-2 U1.9-1 U1.9-2 U1.9-43 U1.9-44 U1.9-45 U1.9-46 U2.18 U2.25 U3.18 U3.25 U4.5 U5.2 U5.4 | length 1071.5
  Bottom Layer w10: U1.9-2 -903.38,2749 -513.02,3139.36 P7.J2-1 P7.J2-2 ; U3.18 -430.02,665.79 U3.25 ; U2.18 355.79,635.79 U2.25
"Green LED": P7.J2-13 R24.1 | length 180.1
  Bottom Layer w10: R24.1 115.06,3294.27 115.06,3235.18 185.45,3164.79 P7.J2-13@185.45,3159.96
NetC1_2: C1.2 U2.14 | length 69.7
  Bottom Layer w10: U2.14 434.53,590.47 452.56,572.44 C1.2
NetC6_2: C6.2 R9.1 | length 73.3
  Bottom Layer w10: R9.1 C6.2@614.84,430.59
NetC7_2: C7.2 U3.14 | length 65.3
  Bottom Layer w10: U3.14 -351.28,598.57 C7.2@-332.44,579.72
NetC13_2: C13.2 R30.1 | length 77.9
  Bottom Layer w10: R30.1 -135.84,440.59 C13.2
NetDS1_2: DS1.2 R22.2 | length 171
  Top Layer w10: v1(-169.38,3357) -169.38,3349.61 -172.38,3346.61 -121.63,3295.87 DS1.2
  Bottom Layer w10: v1(-169.38,3357) -169.38,3344 -140.24,3314.86 -123.6,3314.86 R22.2
NetDS2_2: DS2.2 R23.2 | length 169.1
  Top Layer w10: v1(160.62,3364) 168.28,3356.35 168.28,3340.43 199.66,3309.05 DS2.2@199.66,3287.99
  Bottom Layer w10: v1(160.62,3364) 160.62,3351.78 R23.2
NetDS3_2: DS3.2 R24.2 | length 154.8
  Top Layer w10: v1(-8.38,3355) -8.38,3344.85 40.61,3295.87 DS3.2
  Bottom Layer w10: v1(-8.38,3355) -8.38,3350.78 R24.2
NetP3_1: P3.1 U2.1 | length 273.8
  Bottom Layer w10: P3.1@340,970 P3.1 355.79,984.21 U2.1
NetP3_2: P3.2 U2.3 | length 255.8
  Bottom Layer w10: U2.3 395.16,955.16 P3.2
NetP3_3: P3.3 U2.4 | length 289.1
  Bottom Layer w10: U2.4 414.84,874.84 P3.3
NetP3_4: P3.4 U2.6 | length 339.2
  Bottom Layer w10: U2.6 454.21,814.21 P3.4 P3.4@640,975
NetP5_1: P5.1 U3.1 | length 308
  Bottom Layer w10: P5.1 -620,975 -620,970.29 -450.54,800.83 -430.54,800.83 -430.02,800.31 U3.1
NetP5_2: P5.2 U3.3 | length 271.2
  Bottom Layer w10: P5.2 -390.65,845.65 U3.3
NetP5_3: P5.3 U3.4 | length 237.9
  Bottom Layer w10: P5.3 -420,975 -420,914 -370.97,864.97 U3.4
NetP5_4: P5.4 U3.6 | length 212.8
  Bottom Layer w10: P5.4 -331.6,986.6 U3.6
NetR1_1: R1.1 U2.11 | length 216.5
  Bottom Layer w10: U2.11 583.78,655.47 591.46,663.15 658.35,663.15 R1.1
NetR2_1: R2.1 U2.10 | length 283.9
  Bottom Layer w10: U2.10 484.68,677.09 711.65,677.09 R2.1
NetR3_1: R3.1 U2.12 | length 132.4
  Bottom Layer w10: U2.12 614.13,635.79 R3.1
NetR4_1: R4.1 U2.2 | length 333
  Bottom Layer w10: U2.2 378.94,766.22 378.94,1033.7 375.47,1037.17 375.47,1077.44 R4.1 R4.1@385,1085
NetR5_1: R5.1 U2.5 | length 397.1
  Bottom Layer w10: U2.5 434.53,821.89 578.94,966.3 578.94,1086.97 R5.1 R5.1@590,1085
NetR6_2: R6.2 U2.19 U2.20 | length 221.8
  Bottom Layer w10: R6.2 133.33,635.79 U2.19 U2.20
NetR6_3: R6.3 U2.21 | length 85.6
  Bottom Layer w10: R6.3 241.83,675.16 U2.21
NetR7_2: R7.2 U2.24 | length 110.1
  Bottom Layer w10: R7.2 317.28,734.21 U2.24
NetR8_2: R8.2 U2.23 | length 89.6
  Bottom Layer w10: R8.2 273.68,714.53 U2.23
NetR10_1: R10.1 U3.2 | length 392.7
  Bottom Layer w10: R10.1 -595,965 -518.51,888.51 -492.06,888.51 -415.58,812.03 -415.58,809.21 -410.34,803.98 U3.2
NetR11_1: R11.1 U3.11 | length 200.9
  Bottom Layer w10: U3.11 -163.03,685.47 R11.1
NetR12_1: R12.1 U3.10 | length 122.7
  Bottom Layer w10: U3.10 -213.35,705.16 R12.1
NetR13_1: R13.1 U3.12 | length 279
  Bottom Layer w10: U3.12 -112.72,665.79 R13.1
NetR15_1: R15.1 U3.5 | length 313.9
  Bottom Layer w10: R15.1 -395,944.31 -351.28,900.59 U3.5
NetR17_2: R17.2 U3.19 U3.20 | length 265.1
  Bottom Layer w10: R17.2 -516.54,625 -475.75,665.79 U3.19 U3.20
NetR17_3: R17.3 U3.21 | length 128.8
  Bottom Layer w10: R17.3 -524.73,670.28 -489.84,705.16 U3.21
NetR18_1: R18.1 U4.3 | length 125.7
  Bottom Layer w10: U4.3 370.15,2491.57 369.31,2492.4 369.31,2593.8 381.05,2605.54 R18.1
NetR19_2: R19.2 U4.2 | length 134.6
  Bottom Layer w10: R19.2 325.17,2605.53 336.9,2593.8 336.9,2559.13 349.63,2546.4 349.63,2492.4 350.47,2491.57 U4.2
NetR21_1: R21.1 U5.3 | length 77.1
  Bottom Layer w10: R21.1 -112.14,2399.39 U5.3
NetR28_2: R28.2 U3.24 | length 121.8
  Bottom Layer w10: R28.2 -522.72,764.21 U3.24
NetR29_2: R29.2 U3.23 | length 106.8
  Bottom Layer w10: R29.2 -558.98,744.53 U3.23
NetR33_1: R33.1 R34.2 U6.4 | length 188.8
  Bottom Layer w10: U6.4 -350.08,2591.46 R33.1 R34.2
NetU1_8-9: U1.8-9 U2.13 | length 2247.1
  Signal Layer 2 w10: v1(805,495) 805,2210 884,2289 U1.8-9
  Bottom Layer w10: U2.13 454.21,607.61 561.82,500 810,500 v1(805,495)
NetU1_8-10: U1.8-10
NetU1_8-11: U1.8-11 U2.9 | length 1792.8
  Signal Layer 1 w10: v1(845,1025) 845,2137.38 U1.8-11
  Bottom Layer w10: U2.9 699.84,694.84 845,840 v1(845,1025)
NetU1_8-12: U1.8-12 U2.8 | length 1839.3
  Top Layer w10: v1(655,755) 785,885 785,2105 822.22,2142.22 949.84,2142.22 U1.8-12
  Bottom Layer w10: U2.8 614.53,714.53 v1(655,755)
NetU1_8-17: U1.8-17 U3.9 | length 2354.3
  Bottom Layer w10: U3.9 -267.91,724.84 -251.14,741.61 -251.14,805.61 293.31,1350.06 1034.92,1350.06 1035.56,1350.7 1035.56,1905.13 1012.75,1927.94 935.56,1927.94 U1.8-17
NetU1_8-18: U1.8-18 U3.8 | length 1910.2
  Bottom Layer w10: U3.8 -280.22,744.53 -267.14,757.61 -267.14,990.61 171.86,1429.61 464.61,1429.61 863.45,1828.45 936.07,1828.45 U1.8-18
NetU1_8-27: U1.8-27
NetU1_8-30: U1.8-30 U3.13 | length 1779.6
  Bottom Layer w10: U3.13 -331.6,636.61 -22.13,636.61 10,668.74 10,775.83 114.17,880 181.25,880 257.86,956.61 257.86,1157.61 340.25,1240 947.62,1240 U1.8-30
NetU1_8-35: U1.8-35
NetU1_8-36: U1.8-36
NetU1_8-37: U1.8-37
NetU1_8-38: U1.8-38
NetU1_9-9: U1.9-9
NetU2_7: U2.7
NetU3_7: U3.7
"Red LED": P7.J2-11 R22.1 | length 249.5
  Bottom Layer w10: R22.1 -56.67,3266.98 -18.69,3229 42.44,3229 106.65,3164.79 P7.J2-11@106.65,3159.96
RS232_RX: R26.1 U1.9-11 | length 1374.8
  Top Layer w10: U1.9-11 -942.31,2250.06 -809.94,2250.06 -135,2925 R26.1
RS232_TX: R27.1 U1.9-13 | length 1903.2
  Top Layer w10: U1.9-13 -1050,2135.62 -1050,2725 -1010,2765 -360,2765 -95,3030 R27.1
SPI1_CS0: U1.9-28
SPI1_MISO: R20.1 U1.9-29 U5.1 | length 1704.7
  Top Layer w10: U1.9-29 -942.31,1350.06 -887.25,1350.06 -770.46,1466.85 -770.46,1845.37 -304.83,2311 v1(-135.69,2311)
  Bottom Layer w10: v1(-135.69,2311) -124.86,2311 -111.27,2324.59 -29.23,2324.59 -23.4,2318.76 -23.4,2263.72 R20.1
SPI1_MISO_DELAY: R20.2 U4.1 U5.6 | length 477.2
  Signal Layer 2 w10: v1(179.24,2314) 254.31,2389.07 v1(254.31,2490.22)
  Bottom Layer w10: R20.2 66.99,2263.72 66.99,2318.76 U5.6@72.82,2324.59 ; U5.6@68.57,2324.59 U5.6@72.82,2324.59 ; v1@182.83,2324.59 U5.6 U5.6@72.82,2324.59 ; v1(254.31,2490.22) 329.6,2490.22 U4.1
SPI1_MOSI: U1.9-30
SPI1_SCLK: U1.9-31 U4.4 | length 2426.4
  Bottom Layer w10: U1.9-31 -947.38,1245 -235,1245 515,1995 515,2365 485,2395 440,2395 389,2446 U4.4
VCC_2V85: P7.J3-20 R25.1 | length 174.7
  Top Layer w10: R25.1@378.46,2900 440,2900 v1(455,2915)
  Bottom Layer w10: v1(455,2915) 455,2832.92 458.92,2829 P7.J3-20
VMOT: C1.1 C3.2 C4.1 C5.1 C7.1 C8.2 C12.1 C14.1 C16.1 R9.2 R30.2 R33.2 U2.15 U2.16 U3.15 U3.16 U6.2 U6.3 U6.6 U6.7 | length 3881.4
  Signal Layer 1 w10: v1(-495,2210) 40,1675 40,485 -390,485 v1(-405,500) ; -45,485 v1(390,485)
  Bottom Layer w10: -495,2605 -490,2610 -490,2655 -451.54,2693.46 R33.2 ; C8.2@-475,440.16 -395,440.16 R30.2@-285,440.16 ; U3.16 U3.16@-389.84,637.24 ; C12.1@-389.84,440.59 U3.16@-389.84,637.24 ; U3.15 U3.16@-389.84,637.24 ; C3.2 300.16,430.59 C5.1 C4.1@405.16,430.59 ; U2.16@395,609.24 395,432.59 R9.2 ; U2.16 U2.15